# EAGLE board version1 (EAGLE 9.5.1)
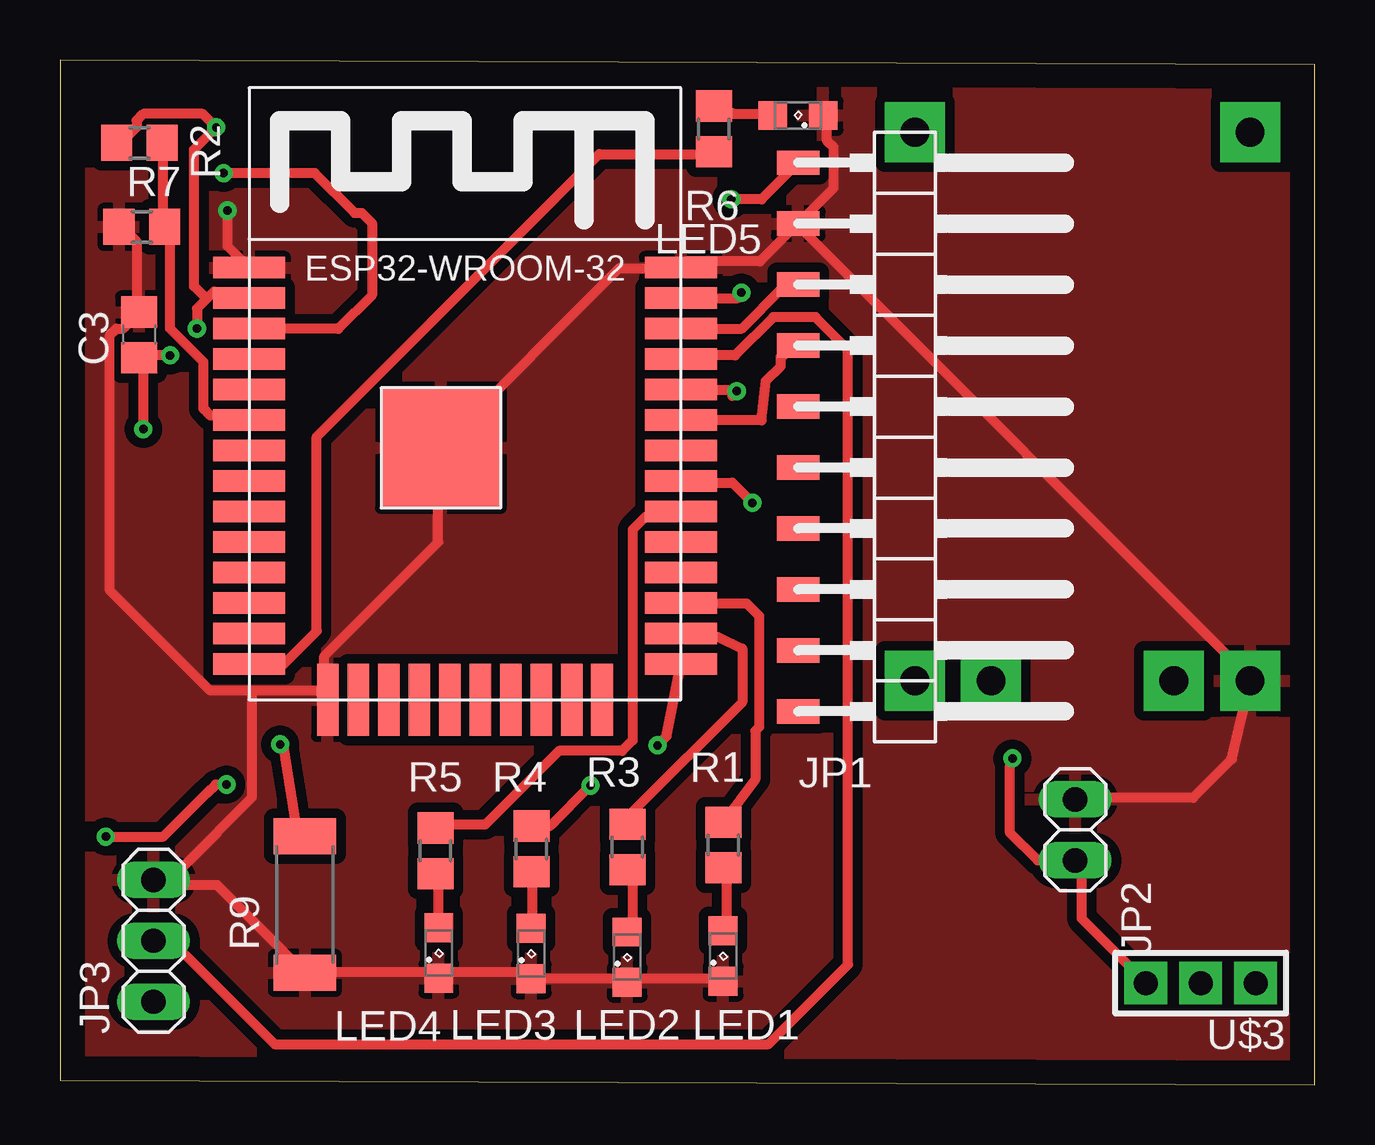
[diagram p0: board, top side]
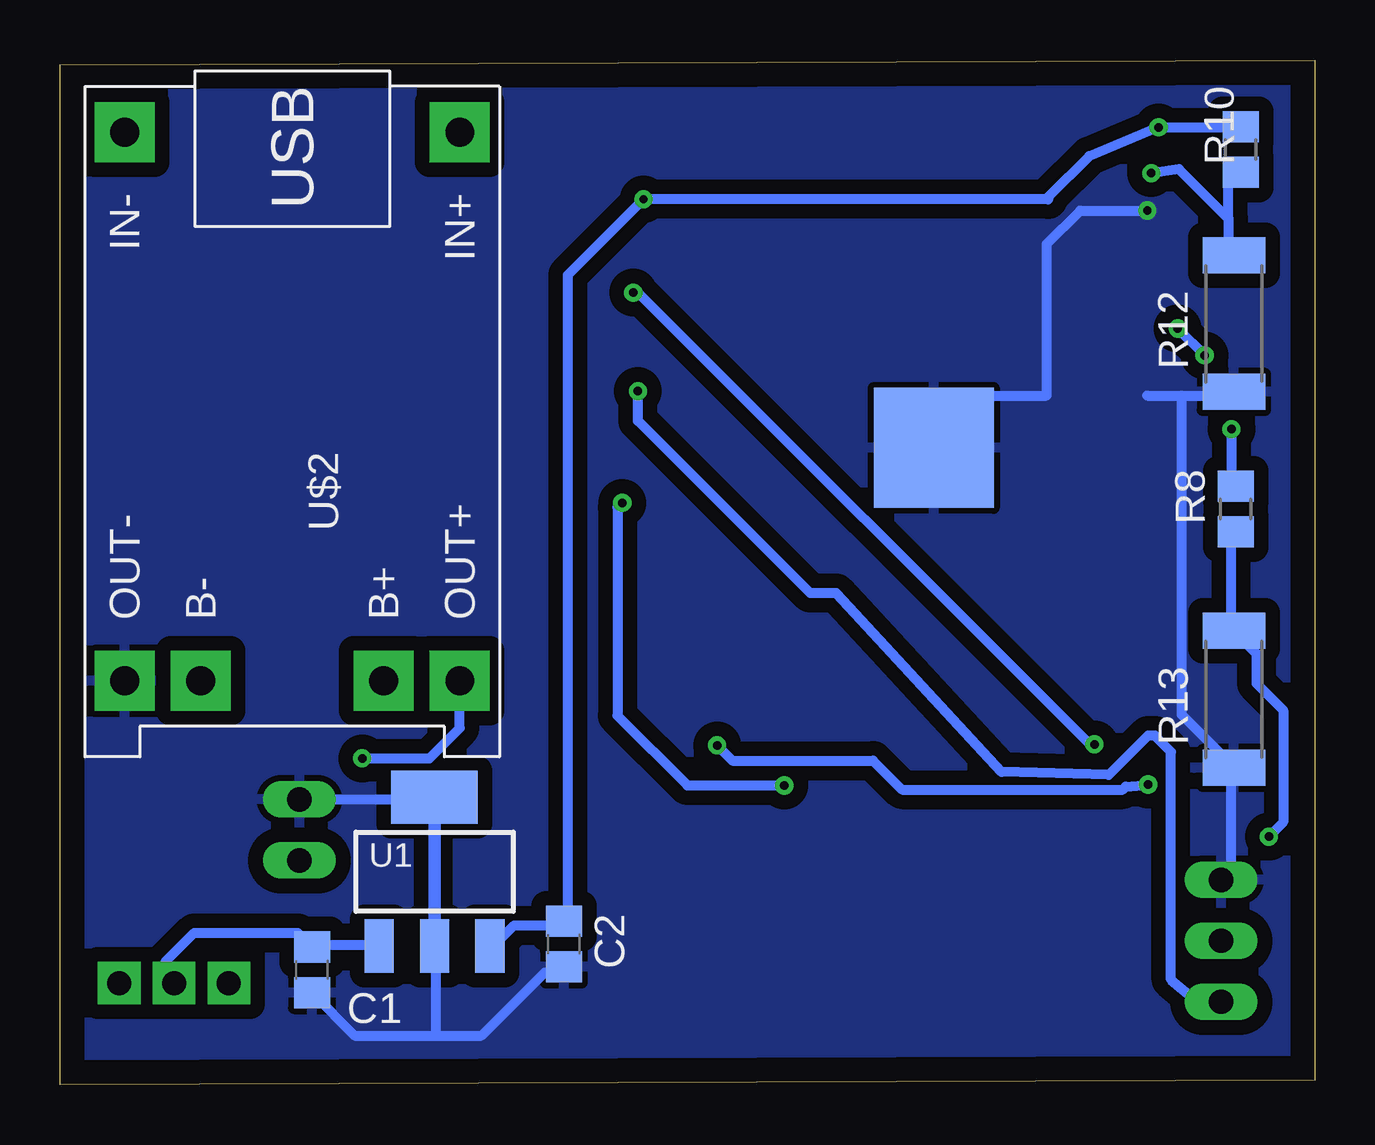
[diagram p1: board, bottom side, seen from below]

Size 52.3 x 42.7 mm. Coordinates in mm from the lower left corner, seen from the top.
Outline: 0,0.2 52.3,0 52.3,42.5 0,42.7 0,0.2
Copper layers (1*16): Top 0.035mm / dielectric 1.5mm / Bottom 0.035mm
Design rules "default": minimum track width 6mil, minimum drill 0.35mm, track to track 6mil, track to pad 6mil, pad to pad 6mil, via to via 6mil, smd to smd 6mil, copper to edge 40mil, drill to drill 6mil, minimum pad ring 10mil, minimum via ring 8mil, stop-mask expansion 4mil, vias tented up to drill 0mil, thermal gap 10mil
Net classes: 0 default: width 0.406 mm

## Footprints (pad centres in the part's own frame; a part is rotated, then mirrored left to right if it is on the bottom)
C0805 = smd 1.3 x 1.5: 1 -0.95,0; 2 0.95,0
1X10SMD/90 = smd 1.016 x 1.778: 1 -1.27,-5.08; 2 1.27,-5.08; 3 3.81,-5.08; 4 6.35,-5.08; 5 8.89,-5.08; 6 11.43,-5.08; 7 13.97,-5.08; 8 16.51,-5.08; 9 19.05,-5.08; 10 21.59,-5.08
1X02 = drill 1.016 long: 1 -1.27,0; 2 1.27,0
1X03 = drill 1.016 long: 1 -2.54,0; 2 0,0; 3 2.54,0
SML0805 = smd 1.2 x 1.2: A 1.05,0; C -1.05,0
R0805 = smd 1.3 x 1.5: 1 -0.95,0; 2 0.95,0
M2309 = smd 1.5 x 2.6: 1 -2.85,0; 2 2.85,0
SOT-223-3 = smd 1.219 x 2.235: 1 -2.311,-3.099; 2 0,-3.099; 3 2.311,-3.099 | smd 3.6 x 2.2: 4 0,3.099
ESP32-WROOM = smd 3 x 0.9: 3V3 0,16.74; EN 0,15.47; GND1 0,18.01; GND3 18,18.01; IO0 18,1.5; IO4 18,2.77; IO5 18,6.58; IO12 0,1.5; IO14 0,2.77; IO16 18,4.04; IO17 18,5.31; IO18 18,7.85; IO19 18,9.12; IO21 18,11.66; IO22 18,15.47; IO23 18,16.74; IO25 0,6.58; IO26 0,5.31; IO27 0,4.04; IO32 0,9.12; IO33 0,7.85; IO34 0,11.66; IO35 0,10.39; NC 18,10.39; RX 18,12.93; SENSOR_VN 0,12.93; SENSOR_VP 0,14.2; TX 18,14.2 | smd 0.9 x 3: CLK 9.635,0; CMD 8.365,0; GND2 3.285,0; IO2 14.715,0; IO13 4.555,0; IO15 13.445,0; SD0 10.905,0; SD1 12.175,0; SD2 5.825,0; SD3 7.095,0 | smd 5 x 5: GND4 8,10.5 | smd 5 x 5 bottom: GND5 8,10.5
BATTERY-CHARGER-LI-PROT = drill 1.2 pad 2.5 square: B+ 10.795,3.81; B- 10.795,-3.81; IN+ -12.065,6.985; IN- -12.065,-6.985; OUT+ 10.795,6.985; OUT- 10.795,-6.985
CON3 = drill 1 pad 1.778 square: P$1 -2.794,0.254; P$2 -0.508,0.254; P$3 1.778,0.254

## Placement (x,y rotation side)
C1  10uf  [C0805]  41.8,4.79 270 bottom
C2  10uf  [C0805]  31.3,5.87 270 bottom
C3  10uf  [C0805]  3.3,31.25 90 top
JP1  [1X10SMD/90]  35.85,37.15 270 top
JP2  [1X02]  42.32,10.62 90 top
JP3  [1X03]  3.9,6 90 top
LED1  [SML0805]  27.64,5.37 90 top
LED2  [SML0805]  23.64,5.32 90 top
LED3  [SML0805]  19.64,5.47 90 top
LED4  [SML0805]  15.79,5.49 90 top
LED5  [SML0805]  30.76,40.39 180 top
R1  330  [R0805]  27.65,9.99 90 top
R2  10k  [R0805]  3.31,39.25 180 top
R3  330  [R0805]  23.65,9.91 90 top
R4  330  [R0805]  19.65,9.83 90 top
R5  330  [R0805]  15.65,9.75 90 top
R6  330  [R0805]  27.25,39.83 270 top
R7  10k  [R0805]  3.41,35.75 0 top
R8  10k  [R0805]  3.3,23.99 90 bottom
R9  [M2309]  10.21,7.51 90 top
R10  10k  [R0805]  3.09,38.97 90 bottom
R12  [M2309]  3.37,31.72 90 bottom
R13  [M2309]  3.37,16.06 90 bottom
U1  TC1262_VDB  [SOT-223-3]  36.69,8.88 0 bottom
U$1  ESP32-WROOM  [ESP32-WROOM]  7.88,16.04 0 top
U$2  BATTERY-CHARGER-LI-PROT  [BATTERY-CHARGER-LI-PROT]  42.62,27.63 270 bottom
U$3  -MICROSW  [CON3]  47.04,4.49 180 top

## Library data of the parts
C1-C3 = rcl; SPICEPREFIX: C
JP1 = pinhead-2
JP2 JP3 = pinhead
LED1-LED5 = led
R1-R10 R12 R13 = rcl; SPICEPREFIX: R
U1 = bt_regulator
U$1 = ESP32
U$2 = diy-modules
U$3 = tango

## Nets
ADC34: R2.1 R7.2 U$1.IO34
BAT0: R1.2 U$1.IO16
BAT1: R3.2 U$1.IO4
BAT2: R4.2 U$1.IO19
BAT3: R5.2 U$1.IO18
BUTTON: R9.2 U$1.IO23
EN: R10.1 R12.2 U$1.EN
GND: C1.2 C2.2 C3.2 JP1.2 JP2.2 JP3.3 LED1.C LED2.C LED3.C LED4.C LED5.C R7.1 R9.1 R12.1 R13.1 U$1.GND1 U$1.GND2 U$1.GND3 U$1.GND4 U$1.GND5 U$2.OUT-
INDICATOR: R6.2 U$1.IO12
IO0: R8.1 R13.2 U$1.IO0
N$1: LED5.A R6.1
N$2: JP2.1 U$2.OUT+ U$3.P$3
N$3: LED1.A R1.1
N$4: LED2.A R3.1
N$5: LED3.A R4.1
N$6: LED4.A R5.1
N$7: C1.1 U1.1 U$3.P$2
RX: JP3.1 U$1.RX
SCL: JP1.3 U$1.IO22
SDA: JP1.4 U$1.IO21
TAB: U1.2 U1.4
TX: JP3.2 U$1.TX
VCC: C2.1 C3.1 JP1.1 R2.2 R8.2 R10.2 U1.3 U$1.3V3

## Tracks (layer width: path | path; a pad name or v marks a point on that pad's centre or on a via)
ADC34
  Top 0.406: R2.1 4.31,39.06 4.31,35.98 R7.2 4.59,35.7 4.59,31.51 5.99,30.11 5.99,28.16 6.27,27.88 7.66,27.88 U$1.IO34
BAT0
  Top 0.406: R1.2 28.98,12.72 28.98,14.74 29.14,14.9 29.14,19.54 28.62,20.06 26.1,20.06 U$1.IO16
BAT1
  Top 0.406: 23.87,11.37 23.87,11.12 R3.2 | 23.87,11.37 28.44,15.94 28.44,18.18 27.42,18.66 26.1,18.66 U$1.IO4 | 23.87,11.37
BAT2  (via drill 0.35)
  Top 0.406: R4.2 20.42,10.78 v22.11,12.47 | v28.86,24.25 28.02,25.09 26.1,25.09 U$1.IO19
  Bottom 0.406: v22.11,12.47 26.15,12.47 29.06,15.38 29.06,24.05 v28.86,24.25
BAT3
  Top 0.406: R5.2 15.77,10.84 17.72,10.84 20.8,13.91 23.43,13.91 23.87,14.35 23.87,23.13 24.43,23.69 25.82,23.69 U$1.IO18
BUTTON  (via drill 0.35)
  Top 0.406: v9.18,14.19 9.33,14.11 9.86,10.71 R9.2 | v28.4,33.01 28.27,33.01 28.27,32.78 U$1.IO23
  Bottom 0.406: v28.4,33.01 28.2,33.01 9.38,14.19 v9.18,14.19
EN  (via drill 0.35)
  Top 0.406: U$1.EN 11.6,31.5 13,32.9 13,35.9 12.58,36.33 12.28,36.33 10.62,37.99 v6.82,37.99
  Bottom 0.406: 3.59,36.09 3.59,34.79 R12.2 | 3.59,36.09 3.59,37.62 R10.1 | R12.2 3.19,34.58 3.19,34.86 R12.2 | 3.59,36.09 5.66,38.16 v6.82,37.99
GND  (via drill 0.35)
  Top 0.406: U$1.GND1 6.98,34.95 v6.98,36.43 | LED1.C 27.5,4.41 23.87,4.41 LED2.C 23.59,4.41 19.68,4.41 LED3.C 19.4,4.69 16.05,4.69 LED4.C 15.77,4.69 10.46,4.69 R9.1 10.18,4.69 6.55,8.32 4.03,8.32 JP3.3 5.15,9.12 7.98,11.95 7.98,16.42 | JP2.2 42.59,11.95 47.23,11.95 48.85,13.58 U$2.OUT- 49.57,16.98 30.85,35.7 JP1.2 | LED5.C 31.97,40.17 31.97,39.33 32.25,39.06 32.25,37.38 30.85,35.98 JP1.2 | JP1.2 30.57,35.7 29.18,34.31 26.1,34.31 U$1.GND3 25.82,34.03 23.31,34.03 16.05,26.76 U$1.GND4 15.77,26.48 15.77,22.61 11.02,17.86 11.02,16.42 U$1.GND2 11.02,16.15 10.74,16.42 7.98,16.42 | R7.1 2.63,35.7 3.19,35.14 3.19,32.35 C3.2 3.19,32.07 2.63,31.51 2.36,31.51 2.08,31.23 2.08,20.62 6.27,16.42 7.98,16.42
  Bottom 0.406: 6.98,28.72 5.55,28.72 | 5.55,28.72 3.47,28.72 R12.1 | U$1.GND4 15.77,26.76 13.81,28.72 11.18,28.72 11.18,35.03 9.78,36.43 v6.98,36.43 | JP3.3 3.75,8.6 3.47,8.88 3.47,13.07 R13.1 3.47,13.35 5.55,15.43 5.55,28.72 | C1.2 40.01,2.05 36.64,2.05 | 36.64,2.05 34.73,2.05 32.09,4.69 31.41,4.69 C2.2 | 36.64,2.05 36.64,11.28 37.25,11.89 JP2.2
  pour Bottom (isolate 0.61): 0,0.1 0,42.7 52.2,42.7 52.4,42.5 52.4,0.1
  pour Top (isolate 0.406): 0,0.3 0,42.7 52.2,42.7 52.4,42.5 52.4,0.1 0.2,0.1
INDICATOR
  Top 0.406: R6.2 27.1,38.78 22.47,38.78 10.7,27 10.7,18.9 9.34,17.54 7.94,17.54 U$1.IO12
IO0  (via drill 0.35)
  Top 0.406: v24.91,14.15 25.29,14.52 U$1.IO0 | v6.94,12.51 6.48,12.51 6.11,12.14 4.31,10.34 v1.91,10.34
  Bottom 0.406: R8.1 3.47,22.85 3.47,18.94 R13.2 2.43,17.97 2.43,16.73 1.31,15.61 1.31,10.94 v1.91,10.34 | v6.94,12.51 7.88,12.42 8,12.3 17.2,12.3 18.41,13.51 24.27,13.51 v24.91,14.15
N$1
  Top 0.406: LED5.A 29.46,40.45 28.06,40.45 28.01,40.5 R6.1
N$2  (via drill 0.35)
  Top 0.406: U$3.P$3 45.1,4.41 42.59,6.92 42.59,9.16 JP2.1 40.75,9.35 39.6,10.5 39.6,13.3 39.8,13.5 v39.7,13.6
  Bottom 0.406: v39.7,13.6 36.9,13.6 35.63,14.87 U$2.OUT+
N$3
  Top 0.406: LED1.A 27.78,6.65 27.78,8.88 R1.1
N$4
  Top 0.406: LED2.A 23.87,6.65 23.87,8.88 R3.1
N$5
  Top 0.406: LED3.A 19.68,6.65 19.68,8.6 R4.1
N$6
  Top 0.406: LED4.A 15.77,6.65 15.77,8.6 R5.1
N$7
  Bottom 0.406: U1.1 39.24,5.81 41.75,5.81 C1.1 42.39,6.33 46.7,6.33 47.91,5.12 U$3.P$2
RX  (via drill 0.35)
  Top 0.406: U$1.RX 28.14,28.97 v28.21,28.9 28.01,28.7
  Bottom 0.406: v28.21,28.9 28.21,27.67 21.03,20.48 19.94,20.48 13.06,13.04 8.58,12.92 6.95,14.55 6.66,14.55 5.99,13.87 5.99,4.38 4.9,3.46 JP3.1
SCL
  Top 0.406: JP1.3 30.57,33.19 30.1,33.19 28.42,31.51 26.1,31.51 U$1.IO22
SDA
  Top 0.406: U$1.IO21 25.9,27.68 29.24,27.68 29.42,29.33 30.04,29.94 30.04,30.34 30.07,30.34 JP1.4
TAB
  Bottom 0.406: U1.2 36.72,5.81 36.72,11.95 U1.4 36.72,11.95 36.69,11.92
TX
  Top 0.406: JP3.2 4.64,6 8.95,1.69 29.54,1.69 32.85,5 32.85,30.63 31.49,31.99 29.74,31.99 28.14,30.39 26.1,30.39 U$1.TX
VCC  (via drill 0.35)
  Top 0.406: v3.47,27.32 3.47,30.11 C3.1 3.47,30.39 v4.59,30.39 | 6.11,32.75 5.59,33.27 5.59,38.97 v6.51,39.89 5.95,40.45 3.47,40.45 3.19,40.17 3.19,39.89 2.63,39.33 R2.2 | U$1.3V3 7.66,32.91 6.55,32.91 6.41,33.05 6.11,32.75 | JP1.1 29.25,36.9 v27.98,36.9 | v5.71,31.51 5.71,32.35 6.11,32.75
  Bottom 0.406: v3.47,27.32 3.47,25.09 R8.2 | U1.3 34.21,5.81 33.37,6.65 31.41,6.65 C2.1 31.13,6.92 31.13,33.74 v27.98,36.9 11.11,36.9 11.11,36.99 9.4,38.7 v6.51,39.89 3.19,39.89 R10.2 | v5.71,31.51 v4.59,30.39